# Altium PCB RadiationDetector.PcbDoc (part 1 of 3)
Units mm, origin at the board's own origin, x right, y up, seen from the top; angles counter-clockwise.
Board outline 64 x 110 mm, 2 copper layers (Top Layer, Bottom Layer); 114 components, 79 nets, 398 pads, 0 vias.
Unrouted connection lines stored in the file: 269.
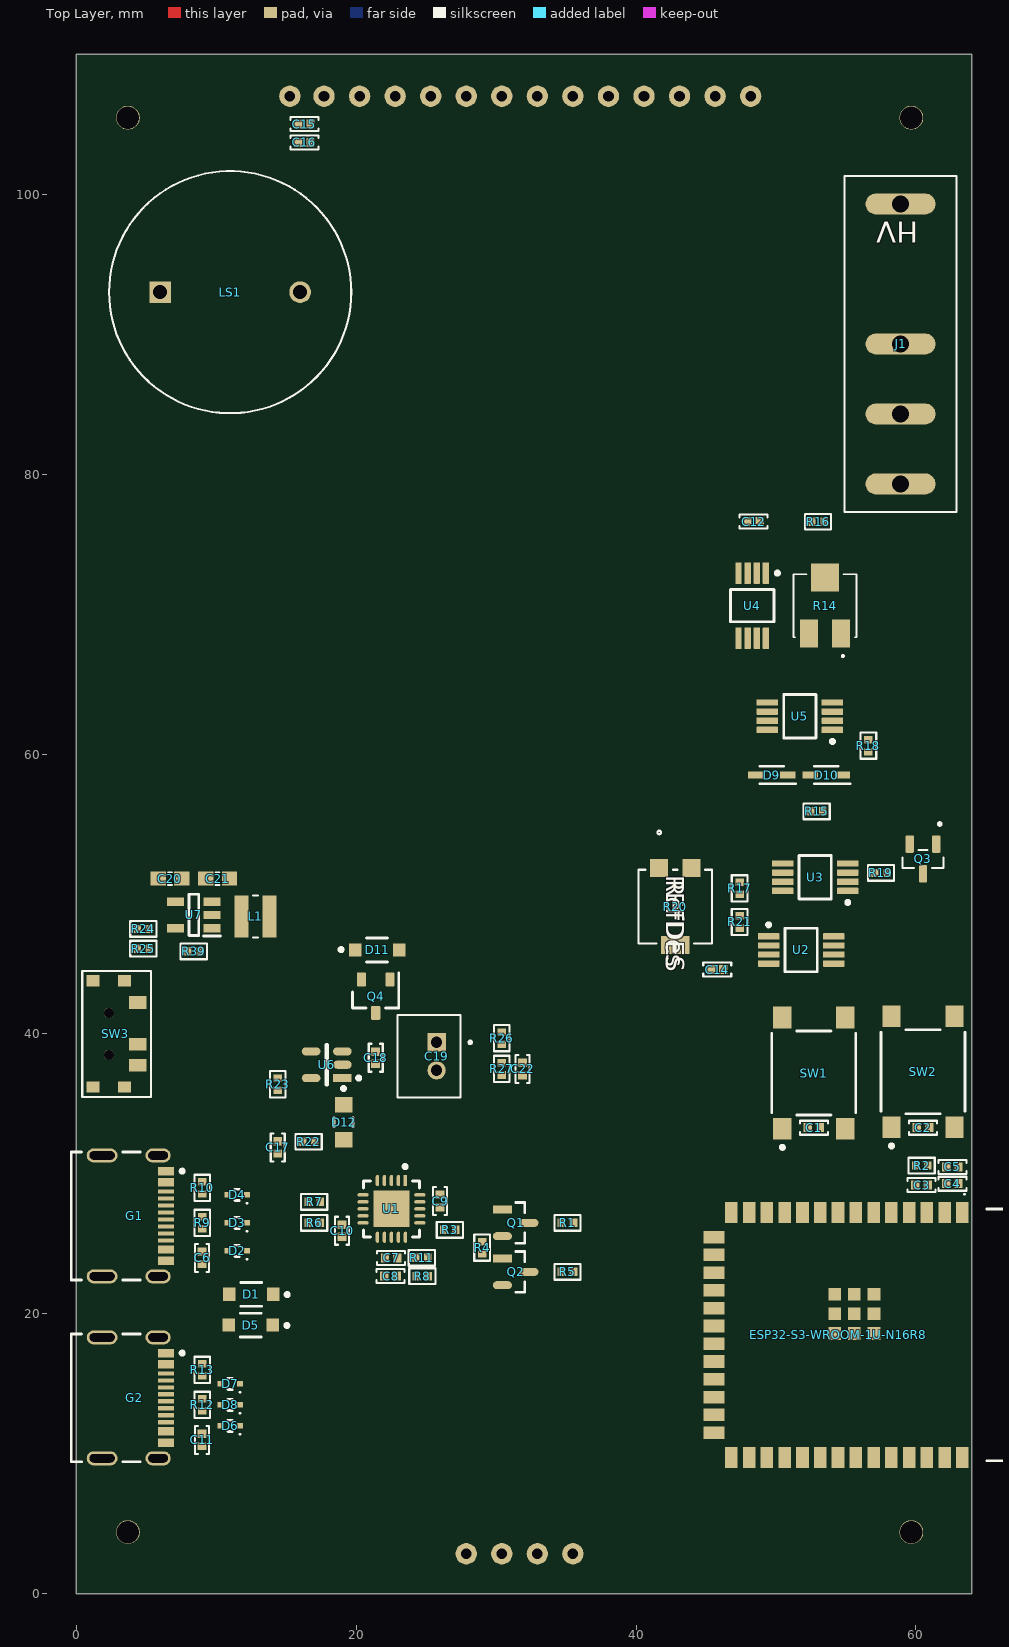
[diagram p0: Top Layer view]
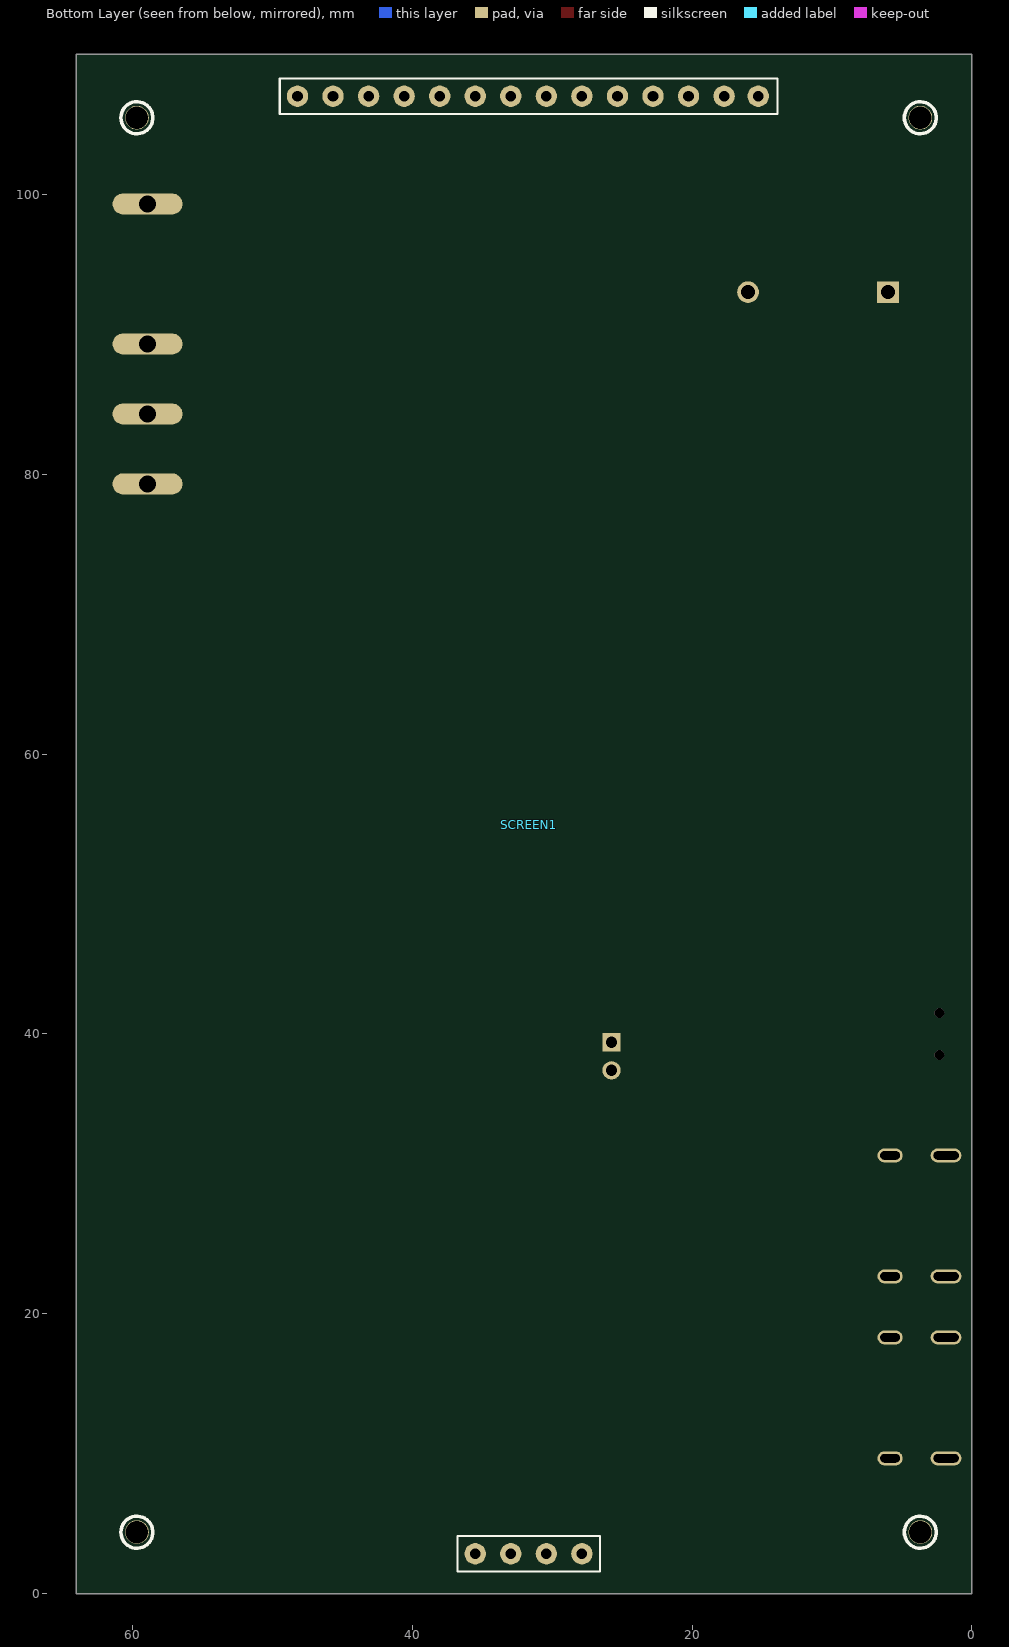
[diagram p1: Bottom Layer view, seen from below]

## Layer stack, top to bottom
Top Solder: solder mask 0.0102, Solder Resist, Dk 3.5
Top Layer: signal copper 0.0356
Dielectric 1: dielectric 0.32, FR-4, Dk 4.8
Bottom Layer: signal copper 0.0356
Bottom Solder: solder mask 0.0102, Solder Resist, Dk 3.5

## Board outline
0,0 64,0 64,110 0,110

## Design rules (kind name [scope] priority, off if disabled: settings)
Clearance [All] p1: gap=0.254 ignorepadtopadclearanceinfootprint=FALSE
ComponentClearance [HasFootprint('LCD_TOUCHSCREEN')] p1: gap=0 collisioncheckmode=3 verticalgap=0 showdistances=FALSE
DiffPairsRouting [All] p1: maxlimit=0.254 minlimit=0.254 mostfreqgap=0.254 toplayer_minwidth=0.381 toplayer_maxwidth=0.381 toplayer_prefwidth=0.381 bottomlayer_minwidth=0.381 bottomlayer_maxwidth=0.381 bottomlayer_prefwidth=0.381 maxuncoupledlength=12.7
PolygonConnect [All] p1: connectstyle=Relief reliefconductorwidth=0.254 reliefentries=4 polygonreliefangle="90 Angle" airgapwidth=0.254
RoutingVias [All] p1: holewidth=0.711 width=1.27 viastyle="Through Hole" minholewidth=0.711 minwidth=1.27 maxholewidth=0.711 maxwidth=1.27
SolderMaskExpansion [All] p1: expansion=0.102 istentingtop=FALSE
SupplyNets "Schematic Supply Nets_3" [InNet('GND')] p1: voltage=0.000
SupplyNets "Schematic Supply Nets_8" [InNet('+Vin_Buck')] p2: voltage=0.000
SupplyNets "Schematic Supply Nets_7" [InNet('+3V3')] p3: voltage=0.000
SupplyNets "Schematic Supply Nets_6" [InNet('V_BAT')] p4: voltage=0.000
SupplyNets "Schematic Supply Nets_5" [InNet('+5V_VBUS2')] p5: voltage=0.000
SupplyNets "Schematic Supply Nets_2" [InNet('+500V')] p6: voltage=0.000
SupplyNets "Schematic Supply Nets_1" [InNet('+5V_VBUS1')] p7: voltage=0.000
SupplyNets "Schematic Supply Nets" [InNet('+5V')] p8: voltage=0.000
Width [All] p1: maxlimit=0.254 minlimit=0.254 preferedwidth=0.254
28 further rules are at their usual default settings.

## Classes and differential pairs
differential pair class DIFF90: ESP_USB
differential pair FTDI_USB: +FTDI_USB_P -FTDI_USB_N
differential pair ESP_USB: +ESP_USB_P -ESP_USB_N
differential pair CON1_USB: +CON1_USB_P -CON1_USB_N

## Components (designator, comment, footprint, x,y, rotation, side; value= is the part's Value field where it differs from the comment)
C1 "0.1uF, 50V" "CAP 0402_1005" 52.7,33.3 r180 top value=100nF
C2 "0.1uF, 50V" "CAP 0402_1005" 60.5,33.3 r180 top value=100nF
C3 "1uF, 16V" "CAP 0402_1005" 60.4,29.2 r180 top value=1uF
C4 "10uF, 10V" "CAP 0402_1005" 62.6,29.3 r180 top value=10uF
C5 "0.1uF, 50V" "CAP 0402_1005" 62.6,30.5 r180 top value=100nF
C6 "0.1uF, 50V" "CAP 0402_1005" 9,24 r90 top value=100nF
C7 "4u7 6.3V" "CAP 0402_1005" 22.5,24 r180 top value=4.7uF
C8 "0.1uF, 50V" "CAP 0402_1005" 22.46,22.7 r180 top value=100nF
C9 "0.1uF, 50V" "CAP 0402_1005" 26,28.06 r90 top value=100nF
C10 "0.1uF, 50V" "CAP 0402_1005" 19,25.94 r90 top value=100nF
C11 "0.1uF, 50V" "CAP 0402_1005" 9,11 r90 top value=100nF
C12 "470p 50V" "CAP 0402_1005" 48.4,76.6 r180 top value=470pF
C13 "220p 50V" "CAP 0402_1005" 116.724,126.331 r90 top value=220pF
C14 "0.1uF, 50V" "CAP 0402_1005" 45.8,44.6 r180 top value=100nF
C15 "10uF, 10V" "CAP 0402_1005" 16.3,105 r180 top value=10uF
C16 "0.1uF, 50V" "CAP 0402_1005" 16.3,103.7 r180 top value=100nF
C17 "4u7 6.3V" "CAP 0402_1005" 14.4,31.9 r90 top value=4.7uF
C18 "4u7 6.3V" "CAP 0402_1005" 21.4,38.3 r90 top value=4.7uF
C19 "2 Pin JST" JST_B2B-PH-K-S 25.2,38.4 r90 top
C20 "22u 6.3V" CAPC1608X90 6.7,51.1 r180 top value=22uF
C21 "22u 6.3V" CAPC1608X90 10.1,51.1 r0 top value=22uF
C22 "0.1uF, 50V" "CAP 0402_1005" 31.9,37.5 r90 top value=100nF
C23 "220u 6.3V" ANTC3225X280N 250.709,-69.249 r0 top value=220uF
C24 "0.1uF, 50V" "CAP 0402_1005" 254.9,-68.614 r90 top value=100nF
C25 "1uF, 16V" "CAP 0402_1005" 260.742,-68.614 r90 top value=1uF
C26 "10nF 1KV" "CAP 1206_3216 - 1.2MM" 203.338,-68.741 r0 top value=10nF
C27 "10nF 1KV" "CAP 1206_3216 - 1.2MM" 163.333,-68.741 r0 top value=10nF
C28 "330pF 100V" CAPC2012X94N 144.537,-69.249 r90 top value=330pF
C29 "220p 50V" "CAP 0402_1005" 109.612,-68.614 r90 top value=220pF
C30 "TLV3691IDCKR" FP-DCK0005A-IPC_B 117.232,-68.868 r0 top
C31 "10 pF 1KV" "CAP 1206_3216 - 1.2MM" 105.294,-68.741 r0 top value=10pF
D1 "1N5819HW-7-F" FP-SOD123-MFG 12.5,21.4 r180 top
D2 "ESD5B5.0ST1G" ONSC-SOD-523-2-502-01_C_V 11.5,24.5 r180 top
D3 "ESD5B5.0ST1G" ONSC-SOD-523-2-502-01_C_V 11.5,26.5 r180 top
D4 "ESD5B5.0ST1G" ONSC-SOD-523-2-502-01_C_V 11.5,28.5 r180 top
D5 "1N5819HW-7-F" FP-SOD123-MFG 12.475,19.2 r180 top
D6 "ESD5B5.0ST1G" ONSC-SOD-523-2-502-01_C_V 11,12 r180 top
D7 "ESD5B5.0ST1G" ONSC-SOD-523-2-502-01_C_V 11,15 r180 top
D8 "ESD5B5.0ST1G" ONSC-SOD-523-2-502-01_C_V 11,13.5 r180 top
D9 "PMEG4010BEA,115" SOD2512X110N 49.7,58.5 r180 top
D10 "PMEG4010BEA,115" SOD2512X110N 53.6,58.5 r180 top
D11 "1N5819HW-7-F" FP-SOD123-MFG 21.5,46 r0 top
D12 "RED LED" FP-LTST-C171KGKT-MFG 19.1,33.7 r270 top
D13 "RS2MBF" RS2MBF 244.359,-72.17 r90 top
D14 "3SMAJ5951B-TP" DIOM4325X244N 237.755,-71.154 r90 top
D15 "3SMAJ5951B-TP" DIOM4325X244N 191.019,-71.154 r90 top
D16 "3SMAJ5951B-TP" DIOM4325X244N 168.54,-71.154 r90 top
D17 "3SMAJ5951B-TP" DIOM4325X244N 151.014,-71.154 r90 top
D18 "3SMAJ5951B-TP" DIOM4325X244N 139.584,-71.154 r90 top
D19 "BAS21" SOT-23 134.25,-69.249 r0 top
D20 "BAS21" SOT-23 98.944,-69.249 r0 top
ESP32-S3-WROOM-1U-N16R8 "ESP32-S3-WROOM-1U-N16R8" ESP32S3WROOM1N8R2 58.06,18.5 r270 top
G1 "2171790001" FP-2171790001-MFG 3,27 r270 top
G2 "2171790001" FP-2171790001-MFG 3,14 r270 top
J1 "GX16_4PIN" WIRE_HARNESS_4PIN_HV 58.9,89.3 r180 top
L1 "2.2 uH" IND_VLS3015ET-220M-CA 12.8,48.4 r0 top
L2 "1mH 1.850R" 48102SC 280.046,-74.71 r0 top
LS1 "PS1720P02" FP-PS1720P02-MFG 11,93 r0 top
Q1 "SS8050-G" FP-SS8050-G-IPC_B 31.4,26.5 r0 top
Q2 "SS8050-G" FP-SS8050-G-IPC_B 31.4,23 r0 top
Q3 "2N7002" SOT95P240X111-3N 60.5,52.5 r270 top
Q4 "WPM2015-3/TR" SOT-23 21.4,42.7 r270 top
Q5 "HX2300A" SOT-23 180.351,-69.249 r0 top
Q6 "STD3NK80ZT4" DPAK_STM 210.958,-72.805 r0 top
R1 "0R" RESC1005X37N 35.1,26.5 r0 top
R2 "10K" RESC1005X37N 60.4,30.6 r0 top value=10kR
R3 "10K" RESC1005X37N 26.7,26 r0 top value=10kR
R4 "10K" RESC1005X37N 29,24.732 r270 top value=10kR
R5 "0R" RESC1005X37N 35.1,23 r0 top
R6 "27R" RESC1005X37N 17,26.5 r0 top
R7 "27R" RESC1005X37N 17,28 r0 top
R8 "4K7" RESC1005X37N 24.732,22.7 r180 top value=4.7kR
R9 "5k1" RESC1005X37N 9,26.5 r270 top value=5.1kR
R10 "5k1" RESC1005X37N 9,29 r90 top value=5.1kR
R11 "10K" RESC1005X37N 24.7,24 r0 top value=10kR
R12 "5k1" RESC1005X37N 9,13.5 r90 top value=5.1kR
R13 "5k1" RESC1005X37N 9,16 r90 top value=5.1kR
R14 "2K" TRIM_3314J-1-202E 53.5,70.6 r0 top value=2kR
R15 "1K" RESC1005X37N 52.9,55.9 r0 top value=1kR
R16 "150R" RESC1005X37N 53,76.6 r0 top
R17 "47K" RESC1005X37N 47.4,50.4 r90 top value=47kR
R18 "50R" RESC1005X37N 56.6,60.6 r90 top
R19 "1K" RESC1005X37N 57.5,51.5 r180 top value=1kR
R20 "10K" TS53YL_VIS 42.8,49.1 r270 top value=10kR
R21 "1K" RESC1005X37N 47.4,48 r90 top value=1kR
R22 "150R" RESC1005X37N 16.6,32.3 r180 top
R23 "2KR" RESC1005X37N 14.4,36.4 r270 top
R24 "220K" RESC1005X37N 4.8,47.5 r180 top value=220kR
R25 "49.9K" RESC1005X37N 4.8,46.1 r180 top value=49.9kR
R26 "470K" RESC1005X37N 30.4,39.7 r90 top value=470kR
R27 "150K" RESC1005X37N 30.4,37.5 r270 top value=150kR
R28 "560R" RESC1005X37N 266.711,-68.614 r90 top
R29 "1M" RESC1005X37N 225.182,-68.614 r90 top value=1MR
R30 "10M" RESC1005X37N 231.024,-68.614 r90 top value=10MR
R31 "4.99M" RESC3116X65N 220.991,-68.614 r0 top value=4.99MR
R32 "10K" RESC1005X37N 195.718,-68.614 r90 top value=10kR
R33 "4.99M" RESC3116X65N 185.812,-68.614 r0 top value=4.99MR
R34 "4.99M" RESC3116X65N 174.89,-68.614 r0 top value=4.99MR
R35 "82K" RESC1005X37N 155.586,-68.614 r90 top value=82kR
R36 "200K" RESC1005X37N 121.296,-68.614 r90 top value=200kR
R37 "2M" RESC1005X37N 127.138,-68.614 r90 top value=2MR
R38 "3M" RESC1005X37N 91.832,-68.614 r90 top value=3MR
R39 "100K" RESC1005X37N 8.4,45.9 r0 top value=100kR
SCREEN1 "LCD_TOUCHSCREEN" LCD_TouchScreen 31.678,54.93 r180 bottom locked
SW1 "PTS645SH50SMTR92 LFS" FP-PTS645SH50SMTR92LFS-MFG 52.7,37.2 r90 top
SW2 "PTS645SH50SMTR92 LFS" FP-PTS645SH50SMTR92LFS-MFG 60.5,37.3 r90 top
SW3 "MK-12C02-G015" Switch 2.8,40 r90 top
U1 "FT231XQ-R" FP-QFN-20-MFG 22.525,27.5 r270 top
U2 "OPA2354AIDGKR" DGK0008A_M 51.8,46 r0 top
U3 "OPA2354AIDGKR" DGK0008A_M 52.8,51.2 r180 top
U4 "OPA2354AIDGKR" DGK0008A_M 48.3,70.6 r270 top
U5 "OPA2354AIDGKR" DGK0008A_M 51.7,62.7 r180 top
U6 "MCP73831T-2ACI/OT" FP-C04-091-OT-IPC_B 17.9,37.8 r180 top
U7 "SY8089AAAC" SOT95P285X140-5N 8.4,48.5 r180 top

## Footprints (in the part's own frame and the unit in brackets; to place one, negate y for a bottom-side part, rotate by r counter-clockwise, add the part's x,y. Pads: shape width x height; smd on the part's side, far side on the other; paste and mask are expansions set on the pad)
48102SC [mm]
  rect 2.9x5 smd: 1(-4.95,0) 2(4.95,0)
  silkscreen extent -7.5,-6.1 6.1,6.1, body extent -6.11,-6.1 6.11,6.1, height 6.1
ANTC3225X280N [mm]
  rect 1.45x2.81 smd: 1(-1.43,0) 2(1.43,0)
  silkscreen extent -0.39,-1.4 0.39,1.4, body extent -1.6,-1.25 1.6,1.25, height 2.8
"CAP 0402_1005" [mm] "Chip Capacitor, 2-Leads, Body 1.02x0.51mm, IPC Medium Density"
  rect 0.6x0.64 smd: 1(-0.44,0) 2(0.44,0)
  silkscreen extent -1,-0.5 1,0.5, body extent -0.5,-0.26 0.5,0.26, height 0.52
"CAP 1206_3216 - 1.2MM" [mm] "Chip Capacitor, 2-Leads, Body 3.25x1.60mm, IPC Medium Density"
  rect 1.3x1.8 smd: 1(-1.45,0) 2(1.45,0)
  silkscreen extent -2.37,-1.12 2.37,1.12, body extent -1.6,-0.8 1.6,0.8, height 1.2
CAPC1608X90 [mm]
  rect 1.1x1 smd: 1(-0.85,0) 2(0.85,0)
  silkscreen extent -0.15,-0.45 0.15,0.45, body extent -0.8,-0.4 0.8,0.4, height 0.9
CAPC2012X94N [mm]
  rect 1.16x1.47 smd: 1(-0.88,0) 2(0.88,0)
  body extent -1,-0.63 1,0.63, height 0.94
DGK0008A_M [mm] "TSOP, 8-Leads, Body 3.1x3.1mm, Pitch 0.65mm, IPC Low Density"
  rrect22% 1.55x0.45 smd: 1(-2.325,0.975) 2(-2.325,0.325) 3(-2.325,-0.325) 4(-2.325,-0.975) 5(2.325,-0.975) 6(2.325,-0.325) 7(2.325,0.325) 8(2.325,0.975)
  silkscreen extent -2.45,-1.55 1.15,1.92, body extent -2.45,-1.5 2.45,1.5, height 0.94
DIOM4325X244N [mm]
  rect 2.33x1.55 smd: 1(-2.135,0) 2(2.135,0)
  silkscreen extent -4.15,-1.29 2.19,1.29
DPAK_STM [mil]
  rect 37x98 smd paste+0 mask+0: 1(-90,-251.5) 3(90,-251.5)
  rect 219x248 smd paste+0 mask+0: 2(0,69.5)
  silkscreen extent -138,-188 138,128, body extent -127,-234 128,148, height 94
ESP32S3WROOM1N8R2 [mm]
  rect 1.5x0.9 smd: 1(-8.75,5.26) 2(-8.75,3.99) 3(-8.75,2.72) 4(-8.75,1.45) 5(-8.75,0.18) 6(-8.75,-1.09) 7(-8.75,-2.36) 8(-8.75,-3.63) 9(-8.75,-4.9) 10(-8.75,-6.17) 11(-8.75,-7.44) 12(-8.75,-8.71) 13(-8.75,-9.98) 14(-8.75,-11.25) 27(8.75,-11.25) 28(8.75,-9.98) 29(8.75,-8.71) 30(8.75,-7.44) 31(8.75,-6.17) 32(8.75,-4.9) 33(8.75,-3.63) 34(8.75,-2.36) 35(8.75,-1.09) 36(8.75,0.18) 37(8.75,1.45) 38(8.75,2.72) 39(8.75,3.99) 40(8.75,5.26)
  rect 0.9x1.5 smd: 15(-6.985,-12.5) 16(-5.715,-12.5) 17(-4.445,-12.5) 18(-3.175,-12.5) 19(-1.905,-12.5) 20(-0.635,-12.5) 21(0.635,-12.5) 22(1.905,-12.5) 23(3.175,-12.5) 24(4.445,-12.5) 25(5.715,-12.5) 26(6.985,-12.5)
  rect 0.9x0.9 smd: 41(-1.5,-2.46) 42(-1.5,-1.06) 43(-2.9,-1.06) 44(-2.9,-2.46) 45(-2.9,-3.86) 46(-1.5,-3.86) 47(-0.1,-3.86) 48(-0.1,-2.46) 49(-0.1,-1.06)
  silkscreen extent -10.1,5.35 9,12.75, body extent -9,-12.75 9,12.75, height 3.25
FP-2171790001-MFG [mm]
  rect 0.6x1.15 smd paste+0 mask+0: A1B12(-3.2,3.425) A4B9(-2.4,3.425) B1A12(3.2,3.425) B4A9(2.4,3.425)
  rect 0.3x1.15 smd paste+0 mask+0: A5(-1.25,3.425) A6(-0.25,3.425) A7(0.25,3.425) A8(1.25,3.425) B5(1.75,3.425) B6(0.75,3.425) B7(-0.75,3.425) B8(-1.75,3.425)
  rrect100% 1x1.8 hole 1.4 slot 0.6 at 0 deg paste-2539.97 mask+0: S1(-4.32,2.85) S2(4.32,2.85)
  rrect100% 1x2.2 hole 1.8 slot 0.6 at 0 deg paste-2539.97 mask+0: S3(-4.32,-1.15) S4(4.32,-1.15)
  silkscreen extent -4.57,-3.35 4.57,4.7, body extent -4.92,-3.45 4.92,4.1, height 0.25
FP-C04-091-OT-IPC_B [mm]
  rect 1.338x0.578 smd paste+0 mask+0: 1(-1.116,0.95)
  rrect100% 1.338x0.578 smd paste+0 mask+0: 2(-1.116,0) 3(-1.116,-0.95) 4(1.116,-0.95) 5(1.116,0.95)
  silkscreen extent -2.41,-1.45 0.05,1.45, body extent -1.35,-1.46 1.35,1.44, height 1.45
FP-DCK0005A-IPC_B [mm]
  rect 1.464x0.376 smd paste+0 mask+0: 1(-0.82,0.65)
  rrect100% 1.464x0.376 smd paste+0 mask+0: 2(-0.82,0) 3(-0.82,-0.65) 4(0.82,-0.65) 5(0.82,0.65)
  silkscreen extent -2.23,-1.25 1.05,1.25, body extent -1.05,-1 1.05,1, height 1
FP-LTST-C171KGKT-MFG [mm]
  rect 1.1x1.25 smd paste+0 mask+0: 1(-1.25,0) 2(1.25,0)
  silkscreen extent -2.52,-0.67 0.33,0.67, body extent -1.9,-0.77 1.9,0.77, height 0.25
FP-PS1720P02-MFG [mm]
  rect 1.55x1.55 hole 1 paste-2539.97 mask+0: 1(-5,0)
  round 1.55 hole 1 paste-2539.97 mask+0: 2(5,0)
  silkscreen extent -8.65,-8.65 8.65,8.65, body extent -8.75,-8.75 8.75,8.75, height 0.25
FP-PTS645SH50SMTR92LFS-MFG [mm]
  rect 1.55x1.3 smd paste+0 mask+0: 1(-3.975,2.25) 2(3.975,2.25) 3(-3.975,-2.25) 4(3.975,-2.25)
  silkscreen extent -5.42,-3 3,3, body extent -4.5,-3 4.5,3, height 4.3
FP-QFN-20-MFG [mm]
  rect 0.8x0.25 smd paste+0 mask+0: 1(-2.025,1)
  rrect100% 0.8x0.25 smd paste+0 mask+0: 2(-2.025,0.5) 3(-2.025,0) 4(-2.025,-0.5) 5(-2.025,-1) 11(2.025,-1) 12(2.025,-0.5) 13(2.025,0) 14(2.025,0.5) 15(2.025,1)
  rrect100% 0.25x0.8 smd paste+0 mask+0: 6(-1,-2.025) 7(-0.5,-2.025) 8(0,-2.025) 9(0.5,-2.025) 10(1,-2.025) 16(1,2.025) 17(0.5,2.025) 18(0,2.025) 19(-0.5,2.025) 20(-1,2.025)
  rect 2.6x2.6 smd paste+0 mask+0: 21(0,0)
  silkscreen extent -3.15,-2 2,2, body extent -2.52,-2.52 2.52,2.52, height 0.25
FP-SOD123-MFG [mm]
  rect 0.9x0.95 smd paste+0 mask+0: 1(-1.575,0) 2(1.575,0)
  silkscreen extent -2.7,-0.85 0.75,0.85, body extent -2.12,-0.95 2.12,0.95, height 0.25
FP-SS8050-G-IPC_B [mm]
  rect 1.357x0.572 smd paste+0 mask+0: 1(-0.951,0.95)
  rrect100% 1.357x0.572 smd paste+0 mask+0: 2(-0.951,-0.95) 3(0.951,0)
  silkscreen extent 0,-1.45 0.65,1.45, body extent -1.88,-1.7 1.88,1.7, height 0.25
IND_VLS3015ET-220M-CA [mm]
  rect 1x3 smd: 1(-1,0) 2(1,0)
  silkscreen extent -0.18,-1.5 0.18,1.5, body extent -1.5,-1.5 1.5,1.5, height 1.5
JST_B2B-PH-K-S [mm]
  rect 1.308x1.308 / inner round 1.308 / far side rect 1.308x1.308 hole 0.8: 1(1,-0.55)
  round 1.308 hole 0.8: 2(-1,-0.55)
  silkscreen extent -2.95,-3.05 2.95,2.25, body extent -2.95,-2.25 2.95,2.25, height 6
LCD_TouchScreen [mil]
  round 60 hole 30: 1(550,2050) 2(646.04,2050) 3(450,2050) 4(350,2050) 5(250,2050) 6(150,2050) 7(50,2050) 8(-50,2050) 9(-150,2050) 10(-350,2050) 11(-250,2050) 12(-450,2050) 13(-550,2050) 14(-650,2050) 15(-150,-2050) 16(-50,-2050) 17(50,-2050) 18(150,-2050)
  round 66.93 hole 62.99: 21(-1101.81,-1989.37) 21(-1101.81,1989.37) 21(1101.81,-1989.37) 21(1101.81,1989.37)
  silkscreen extent -1147,-2100 1147,2100, body extent -1224,-2106 1207,2106, height 343
ONSC-SOD-523-2-502-01_C_V [mm] "SOD, 2-Leads, Body 1.2x0.8mm"
  rect 0.4x0.4 smd: 1(-0.7,0) 2(0.7,0)
  silkscreen extent -0.75,-0.4 0.15,0.65, body extent -0.6,-0.4 0.6,0.4, height 0.7
RESC1005X37N [mm]
  rect 0.54x0.6 smd: 1(-0.432,0) 2(0.432,0)
  silkscreen extent -0.94,-0.56 0.94,0.56, body extent -0.5,-0.25 0.5,0.25, height 0.37
RESC3116X65N [mm]
  rect 0.97x1.73 smd: 1(-1.48,0) 2(1.48,0)
  silkscreen extent -0.67,-0.85 0.67,0.85, body extent -1.55,-0.8 1.55,0.8, height 0.65
RS2MBF [mm]
  rect 1.8x2.54 smd: 1(2.4,0) 2(-2.4,0)
  silkscreen extent -4.53,-2.5 4.53,2.5, body extent -2.7,-1.81 2.7,1.81, height 2.47
SOD2512X110N [mm]
  rect 1.1x0.5 smd: 1(-1.15,0) 2(1.15,0)
  silkscreen extent -1.7,-0.63 0.85,0.63, body extent -1.25,-0.59 1.24,0.66, height 0.92
SOT95P240X111-3N [mm]
  rrect25% 1.23x0.6 smd: 1(-1.06,0.95) 2(-1.06,-0.95) 3(1.06,0)
  silkscreen extent -2.6,-1.46 0.65,1.46, body extent -1.3,-1.53 1.3,1.52, height 1.3
SOT95P285X140-5N [mm]
  rect 1.2x0.6 smd: 1(-1.3,0.95) 2(-1.3,0) 3(-1.3,-0.95) 4(1.3,-0.95) 5(1.3,0.95)
  silkscreen extent -1.9,-1.48 0.35,1.5, body extent -1.43,-1.48 1.43,1.48, height 1.4
SOT-23 [mm] "SOT23, 3-Leads, IPC Medium Density, TO-236"
  rrect25% 1x0.65 smd: 1(-1.2,1.02) 2(-1.2,-1.02) 3(1.2,0)
  silkscreen extent -1.65,-1.65 0.85,1.65, body extent -1.33,-1.53 1.27,1.52, height 1.3
Switch [mm]
  rect 0.9x1.25 smd: 1(-2.25,-1.605) 2(-0.75,-1.605) 3(2.25,-1.605)
  rect 0.8x0.93 smd: 26(-3.8,-0.665) 26(-3.8,1.605) 26(3.8,-0.665) 26(3.8,1.605)
  round 0.7 hole 0.705: 27(-1.5,0.47) 27(1.5,0.47)
  silkscreen extent -4.5,-2.53 4.5,2.37, body extent -3.95,-2.03 3.95,3.37, height 1.4
TRIM_3314J-1-202E [mm]
  rect 1.3x2 smd: 1(1.15,-2) 3(-1.15,-2)
  rect 2x2 smd: 2(0,2)
  silkscreen extent -2.25,-3.65 2.25,2.25, body extent -2.5,-2.5 2.5,2.5, height 2.55
TS53YL_VIS [mil]
  rect 51x51 smd paste+0 mask+0: 1(-108.27,-45.28) 3(-108.27,45.28)
  rect 51x79 smd paste-25.5 mask+0: 2(108.27,0)
  Top Layer region: 0,-39.5 0,-39.5 0,-39.5 0,-39.5 0,-39.5 0,-39.5 0,-39.5 0,-39.5
  Top Layer region: 0,39.5 0,39.5 0,39.5 0,39.5 0,39.5 0,39.5 0,39.5 0,39.5
  silkscreen extent -214,-104 104,104, body extent -150,-138 151,134, height 105
WIRE_HARNESS_4PIN_HV [mm]
  oval 5x1.5 hole 1.2: 0(0,10) 1(0,5) 2(0,0) 3(0,-10)
  silkscreen extent -4,-12 4,12

## Part data
C1 C2 C5 C6 C8 C9 C10 C11 C14 C16 C22 C24: library part CL05B104KB5NNNC, "CAP CER 0.1UF 50V X7R 0402", Capacitor Type=Ceramic, Case/Package=0402, LCSC Part Number=C960916, Manufacturer=Samsung, Max Operating Temperature=125°C, Min Operating Temperature=-55°C, Package Shape=Rectangular, Rated DC Voltage (URdc)=50V, Temperature Characteristics Code=X7R, Tolerance  (fill in as +-)=10%, Category="Ceramic Capacitors", ComponentLink1Description=https://datasheet.ciiva.com:443/pdfs/VipMasterIC/IC/SEMS/SEMS-S-A0008523115/SEMS-S-A0008523176-1.pdf?src-supplier=IHS+Markit, ComponentLink1URL=https://datasheet.ciiva.com:443/pdfs/VipMasterIC/IC/SEMS/SEMS-S-A0008523115/SEMS-S-A0008523176-1.pdf?src-supplier=IHS+Markit, ComponentLink2Description=https://datasheet.octopart.com/CL05B104KB5NNNC-Samsung-datasheet-97040617.pdf?src-supplier=Future+Electronics, ComponentLink2URL=https://datasheet.octopart.com/CL05B104KB5NNNC-Samsung-datasheet-97040617.pdf?src-supplier=Future+Electronics, ComponentLink3Description=https://datasheet.octopart.com/CL05B104KB5NNNC-Samsung-datasheet-8326407.pdf?src-supplier=TME, ComponentLink3URL=https://datasheet.octopart.com/CL05B104KB5NNNC-Samsung-datasheet-8326407.pdf?src-supplier=TME, Dielectric Material=Ceramic, JESD-609 Code=e3, Manufacturer Part Number=CL05B104KB5NNNC, Mounting Technology="Surface Mount", Multilayer=Yes, Packaging="Tape and Reel", Pins=2, Pricing="100000=0,00598, 120000=0,00595, 220000=0,00592, 500000=0,00589, 1000000=0,00586 (USD)", Reach SVHC Compliant=Yes, RoHS=Yes, RoHS Compliant=Yes, Supplier=Avnet, Supplier Part Number=CL05B104KB5NNNC, Terminal Finish=Nickel, Termination=Wraparound, Tolerance (fill in as +-)=10%
C3 C25: library part CL05A105KO5NNNC, "CAP CER 1UF 16V X5R 0402", Capacitor Type=Ceramic, Case/Package=0402, LCSC Part Number=C29266, Manufacturer="Samsung Electro-Mechanics", Max Operating Temperature=85°C, Min Operating Temperature=-55°C, Package Shape=Rectangular, Package Style=SMTMeter, Rated DC Voltage (URdc)=16V, Supplier Part Number=1276-1067-1-ND, Temperature Characteristics Code=X5R, Tolerance  (fill in as +-)=10%, Category="Ceramic Capacitors", ComponentLink1Description=https://datasheet.ciiva.com:443/pdfs/VipMasterIC/IC/SEMS/SEMS-S-A0008384515/SEMS-S-A0008892675-1.pdf?src-supplier=IHS+Markit, ComponentLink1URL=https://datasheet.ciiva.com:443/pdfs/VipMasterIC/IC/SEMS/SEMS-S-A0008384515/SEMS-S-A0008892675-1.pdf?src-supplier=IHS+Markit, ComponentLink2Description=https://datasheet.octopart.com/CL05A105KO5NNNC-Samsung-Electro-Mechanics-datasheet-181960514.pdf?src-supplier=Farnell, ComponentLink2URL=https://datasheet.octopart.com/CL05A105KO5NNNC-Samsung-Electro-Mechanics-datasheet-181960514.pdf?src-supplier=Farnell, ComponentLink3Description=https://datasheet.octopart.com/CL05A105KO5NNNC-Samsung-Electro-Mechanics-datasheet-136031720.pdf?src-supplier=Samsung+SCT, ComponentLink3URL=https://datasheet.octopart.com/CL05A105KO5NNNC-Samsung-Electro-Mechanics-datasheet-136031720.pdf?src-supplier=Samsung+SCT, ComponentLink4Description=https://datasheet.octopart.com/CL05A105KO5NNNC-Samsung-Electro-Mechanics-datasheet-110226202.pdf?src-supplier=Future+Electronics, ComponentLink4URL=https://datasheet.octopart.com/CL05A105KO5NNNC-Samsung-Electro-Mechanics-datasheet-110226202.pdf?src-supplier=Future+Electronics, ComponentLink5Description=https://datasheet.octopart.com/CL05A105KO5NNNC-Samsung-Electro-Mechanics-datasheet-81461590.pdf?src-supplier=Future+Electronics, ComponentLink5URL=https://datasheet.octopart.com/CL05A105KO5NNNC-Samsung-Electro-Mechanics-datasheet-81461590.pdf?src-supplier=Future+Electronics, ComponentLink6Description=https://datasheet.octopart.com/CL05A105KO5NNNC-Samsung-Electro-Mechanics-datasheet-149136633.pdf?src-supplier=Future+Electronics, ComponentLink6URL=https://datasheet.octopart.com/CL05A105KO5NNNC-Samsung-Electro-Mechanics-datasheet-149136633.pdf?src-supplier=Future+Electronics, ComponentLink7Description=https://datasheet.octopart.com/CL05A105KO5NNNC-Samsung-Electro-Mechanics-datasheet-97040617.pdf, ComponentLink7URL=https://datasheet.octopart.com/CL05A105KO5NNNC-Samsung-Electro-Mechanics-datasheet-97040617.pdf, ComponentLink8Description=https://datasheet.octopart.com/CL05A105KO5NNNC-Samsung-Electro-Mechanics-datasheet-8324245.pdf, ComponentLink8URL=https://datasheet.octopart.com/CL05A105KO5NNNC-Samsung-Electro-Mechanics-datasheet-8324245.pdf, ComponentLink9Description=https://datasheet.octopart.com/General-Multilayer-Ceramic-Capacitors-Samsung-datasheet-family-111.pdf, ComponentLink9URL=https://datasheet.octopart.com/General-Multilayer-Ceramic-Capacitors-Samsung-datasheet-family-111.pdf, ComponentLink10Description=https://datasheet.octopart.com/CL05A105KO5NNNC-Samsung-Electro-Mechanics-datasheet-11776774.pdf?src-supplier=Arrow+Electronics, ComponentLink10URL=https://datasheet.octopart.com/CL05A105KO5NNNC-Samsung-Electro-Mechanics-datasheet-11776774.pdf?src-supplier=Arrow+Electronics, ComponentLink11Description=https://datasheet.octopart.com/CL05A105KO5NNNC-Samsung-datasheet-97040617.pdf, ComponentLink11URL=https://datasheet.octopart.com/CL05A105KO5NNNC-Samsung-datasheet-97040617.pdf, ComponentLink12Description=https://datasheet.octopart.com/CL05A105KO5NNNC-Samsung-datasheet-8324245.pdf, ComponentLink12URL=https://datasheet.octopart.com/CL05A105KO5NNNC-Samsung-datasheet-8324245.pdf, ComponentLink13Description=https://datasheet.octopart.com/CL05A105KO5NNNC-Samsung-datasheet-42280519.pdf?src-supplier=Future+Electronics, ComponentLink13URL=https://datasheet.octopart.com/CL05A105KO5NNNC-Samsung-datasheet-42280519.pdf?src-supplier=Future+Electronics, ComponentLink14Description=https://datasheet.octopart.com/CL05A105KO5NNNC-Samsung-datasheet-34152987.pdf?src-supplier=Future+Electronics, ComponentLink14URL=https://datasheet.octopart.com/CL05A105KO5NNNC-Samsung-datasheet-34152987.pdf?src-supplier=Future+Electronics, ComponentLink15Description=https://datasheet.octopart.com/CL05A105KO5NNNC-Samsung-datasheet-11776774.pdf?src-supplier=Future+Electronics, ComponentLink15URL=https://datasheet.octopart.com/CL05A105KO5NNNC-Samsung-datasheet-11776774.pdf?src-supplier=Future+Electronics, ComponentLink16Description=https://datasheet.octopart.com/CL05A105KO5NNNC-Samsung-datasheet-8329584.pdf?src-supplier=Future+Electronics, ComponentLink16URL=https://datasheet.octopart.com/CL05A105KO5NNNC-Samsung-datasheet-8329584.pdf?src-supplier=Future+Electronics, ComponentLink17Description=https://datasheet.octopart.com/CL05A105KO5NNNC-Samsung-datasheet-59220082.pdf?src-supplier=TME, ComponentLink17URL=https://datasheet.octopart.com/CL05A105KO5NNNC-Samsung-datasheet-59220082.pdf?src-supplier=TME, Dielectric Material=Ceramic, Height=0.55mm, JESD-609 Code=e3, Length=1mm, Manufacturer Part Number=CL05A105KO5NNNC, Mounting Technology="Surface Mount", Multilayer=Yes, Packaging="Tape and Reel", Pins=2, Pricing="1=0,08, 10=0,014, 100=0,0104, 1000=0,0072, 2500=0,0064 (USD)", Reach SVHC Compliant=Yes, RoHS Compliant=Yes, Stock=655135, Supplier=Digikey, Terminal Finish=Nickel, Termination=Wraparound, Tolerance (fill in as +-)=10%, Width=0.5mm
C4 C15: library part CL05A106MP8NUB8, "CAP CER 10UF 10V X5R 0402", Capacitor Type=Ceramic, Case/Package=0402, LCSC Part Number=C307415, Manufacturer="Samsung Electro-Mechanics", Max Operating Temperature=85°C, Min Operating Temperature=-55°C, Package Shape=Rectangular, Rated DC Voltage (URdc)=10V, Supplier Part Number=1276-6830-1-ND, Temperature Characteristics Code=X5R, Tolerance  (fill in as +-)=20%, Category="Ceramic Capacitors", ComponentLink1Description=https://datasheet.ciiva.com:443/pdfs/VipMasterIC/IC/SEMS/SEMS-S-A0008521219/SEMS-S-A0008521325-1.pdf?src-supplier=IHS+Markit, ComponentLink1URL=https://datasheet.ciiva.com:443/pdfs/VipMasterIC/IC/SEMS/SEMS-S-A0008521219/SEMS-S-A0008521325-1.pdf?src-supplier=IHS+Markit, ComponentLink2Description=https://datasheet.octopart.com/CL05A106MP8NUB8-Samsung-Electro-Mechanics-datasheet-181551178.pdf?src-supplier=Farnell, ComponentLink2URL=https://datasheet.octopart.com/CL05A106MP8NUB8-Samsung-Electro-Mechanics-datasheet-181551178.pdf?src-supplier=Farnell, ComponentLink3Description=https://datasheet.octopart.com/CL05A106MP8NUB8-Samsung-Electro-Mechanics-datasheet-141346815.pdf?src-supplier=Samsung+SCT, ComponentLink3URL=https://datasheet.octopart.com/CL05A106MP8NUB8-Samsung-Electro-Mechanics-datasheet-141346815.pdf?src-supplier=Samsung+SCT, ComponentLink4Description=https://datasheet.octopart.com/CL05A106MP8NUB8-Samsung-Electro-Mechanics-datasheet-136460857.pdf?src-supplier=Future+Electronics, ComponentLink4URL=https://datasheet.octopart.com/CL05A106MP8NUB8-Samsung-Electro-Mechanics-datasheet-136460857.pdf?src-supplier=Future+Electronics, ComponentLink5Description=https://datasheet.octopart.com/CL05A106MP8NUB8-Samsung-Electro-Mechanics-datasheet-110326781.pdf?src-supplier=Future+Electronics, ComponentLink5URL=https://datasheet.octopart.com/CL05A106MP8NUB8-Samsung-Electro-Mechanics-datasheet-110326781.pdf?src-supplier=Future+Electronics, ComponentLink6Description=https://datasheet.octopart.com/CL05A106MP8NUB8-Samsung-Electro-Mechanics-datasheet-96443587.pdf?src-supplier=Future+Electronics, ComponentLink6URL=https://datasheet.octopart.com/CL05A106MP8NUB8-Samsung-Electro-Mechanics-datasheet-96443587.pdf?src-supplier=Future+Electronics, ComponentLink7Description=https://datasheet.octopart.com/CL05A106MP8NUB8-Samsung-Electro-Mechanics-datasheet-68297032.pdf?src-supplier=Future+Electronics, ComponentLink7URL=https://datasheet.octopart.com/CL05A106MP8NUB8-Samsung-Electro-Mechanics-datasheet-68297032.pdf?src-supplier=Future+Electronics, ComponentLink8Description=https://datasheet.octopart.com/CL05A106MP8NUB8-Samsung-Electro-Mechanics-datasheet-86032222.pdf?src-supplier=Future+Electronics, ComponentLink8URL=https://datasheet.octopart.com/CL05A106MP8NUB8-Samsung-Electro-Mechanics-datasheet-86032222.pdf?src-supplier=Future+Electronics, Dielectric Material=Ceramic, JESD-609 Code=e3, Manufacturer Part Number=CL05A106MP8NUB8, Mounting Technology="Surface Mount", Multilayer=Yes, Packaging="Tape and Reel", Pins=2, Pricing="1=0,2, 10=0,12, 100=0,0808, 1000=0,0568 (USD)", Reach SVHC Compliant=Yes, RoHS Compliant=Yes, Stock=145439, Supplier=Digikey, Terminal Finish=Nickel, Termination=Wraparound, Tolerance (fill in as +-)=20%
C7 C17 C18: library part CL05A475KQ5NRNC, "CAP CER 4.7UF 6.3V X5R 0402", Capacitor Type=Ceramic, Case/Package=0402, LCSC Part Number=C2932473, Manufacturer=Samsung, Max Operating Temperature=85°C, Min Operating Temperature=-55°C, Package Shape=Rectangular, Rated DC Voltage (URdc)=6.3V, Supplier Part Number=1276-1481-1-ND, Temperature Characteristics Code=X5R, Tolerance  (fill in as +-)=10%, Category="Ceramic Capacitors", ComponentLink1Description=https://datasheet.ciiva.com:443/pdfs/VipMasterIC/IC/SEMS/SEMS-S-A0008521219/SEMS-S-A0008521124-1.pdf?src-supplier=IHS+Markit, ComponentLink1URL=https://datasheet.ciiva.com:443/pdfs/VipMasterIC/IC/SEMS/SEMS-S-A0008521219/SEMS-S-A0008521124-1.pdf?src-supplier=IHS+Markit, ComponentLink2Description=https://datasheet.ciiva.com/25793/cl05a475kq5nrnc-25793634.pdf?src-supplier=Digikey, ComponentLink2URL=https://datasheet.ciiva.com/25793/cl05a475kq5nrnc-25793634.pdf?src-supplier=Digikey, Dielectric Material=Ceramic, JESD-609 Code=e3, Manufacturer Part Number=CL05A475KQ5NRNC, Mounting Technology="Surface Mount", Multilayer=Yes, Packaging="Tape and Reel", Pins=2, Pricing="1=0,08, 10=0,023, 100=0,016, 1000=0,0112, 2500=0,0096 (USD)", Reach SVHC Compliant=Yes, RoHS=Yes, RoHS Compliant=Yes, Stock=1369367, Supplier=Digikey, Terminal Finish=Nickel, Termination=Wraparound, Tolerance (fill in as +-)=10%
C12: library part CL05B471KB5VPNC, "CAP CER 470PF 50V X7R 0402", Capacitor Type=Ceramic, Case/Package=0402, LCSC Part Number=C472438, Manufacturer=Samsung, Max Operating Temperature=125°C, Min Operating Temperature=-55°C, Package Shape=Rectangular, Rated DC Voltage (URdc)=50V, Supplier Part Number=1276-6586-1-ND, Temperature Characteristics Code=X7R, Tolerance  (fill in as +-)=10%, Category="Ceramic Capacitors", ComponentLink1Description=https://datasheet.ciiva.com:443/pdfs/VipMasterIC/IC/SEMS/SEMS-S-A0005596039/SEMS-S-A0005588397-1.pdf?src-supplier=IHS+Markit, ComponentLink1URL=https://datasheet.ciiva.com:443/pdfs/VipMasterIC/IC/SEMS/SEMS-S-A0005596039/SEMS-S-A0005588397-1.pdf?src-supplier=IHS+Markit, ComponentLink2Description=http://www.samsungsem.com/kr/support/product-search/mlcc/CL05B471KB5VPNC.jsp?src-supplier=Digikey, ComponentLink2URL=http://www.samsungsem.com/kr/support/product-search/mlcc/CL05B471KB5VPNC.jsp?src-supplier=Digikey, ComponentLink3Description=http://www.samsungsem.com/servlet/FileDownload?type=spec&file=CL05B471KB5VPNC.pdf&src-supplier=Avnet, ComponentLink3URL=http://www.samsungsem.com/servlet/FileDownload?type=spec&file=CL05B471KB5VPNC.pdf&src-supplier=Avnet, ComponentLink4Description=https://datasheet.octopart.com/CL05B471KB5VPNC-Samsung-Electro-Mechanics-datasheet-110326788.pdf?src-supplier=Future+Electronics, ComponentLink4URL=https://datasheet.octopart.com/CL05B471KB5VPNC-Samsung-Electro-Mechanics-datasheet-110326788.pdf?src-supplier=Future+Electronics, Dielectric Material=Ceramic, JESD-609 Code=e3, Manufacturer Part Number=CL05B471KB5VPNC, Mounting Technology="Surface Mount", Multilayer=Yes, Packaging="Tape and Reel", Pins=2, Pricing="1=0,1, 10=0,031, 100=0,0179, 1000=0,01119, 2500=0,00885, 5000=0,00853 (USD)", Reach SVHC Compliant=Yes, Reference Standard=AEC-Q200, RoHS=Yes, RoHS Compliant=Yes, Stock=5716, Supplier=Digikey, Terminal Finish=Nickel, Termination=Wraparound, Tolerance (fill in as +-)=10%
C13 C29: library part CL05B221KB5NNNC, "CAP CER 220PF 50V X7R 0402", Capacitor Type=Ceramic, Case/Package=0402, LCSC Part Number=C296710, Manufacturer=Samsung, Max Operating Temperature=125°C, Min Operating Temperature=-55°C, Package Shape=Rectangular, Package Style=SMTMeter, Rated DC Voltage (URdc)=50V, Supplier Part Number=1276-1531-1-ND, Temperature Characteristics Code=X7R, Tolerance  (fill in as +-)=10%, Category="Ceramic Capacitors", ComponentLink1Description=https://datasheet.ciiva.com:443/pdfs/VipMasterIC/IC/SEMS/SEMS-S-A0008384515/SEMS-S-A0008872887-1.pdf?src-supplier=IHS+Markit, ComponentLink1URL=https://datasheet.ciiva.com:443/pdfs/VipMasterIC/IC/SEMS/SEMS-S-A0008384515/SEMS-S-A0008872887-1.pdf?src-supplier=IHS+Markit, ComponentLink2Description=https://datasheet.ciiva.com/25806/cl05b221kb5nnnc-25806724.pdf?src-supplier=Digikey, ComponentLink2URL=https://datasheet.ciiva.com/25806/cl05b221kb5nnnc-25806724.pdf?src-supplier=Digikey, ComponentLink3Description=https://datasheet.ciiva.com/26838/getdatasheetpartid-359684-26838219.pdf?src-supplier=Verical, ComponentLink3URL=https://datasheet.ciiva.com/26838/getdatasheetpartid-359684-26838219.pdf?src-supplier=Verical, ComponentLink4Description=https://datasheet.ciiva.com/16449/cl05b221kb5nnnc-16449133.pdf?src-supplier=Future+Electronics, ComponentLink4URL=https://datasheet.ciiva.com/16449/cl05b221kb5nnnc-16449133.pdf?src-supplier=Future+Electronics, ComponentLink5Description=https://datasheet.ciiva.com/26309/mlcc-catalogdownload2013-eng-26309018.pdf?src-supplier=Distrelec, ComponentLink5URL=https://datasheet.ciiva.com/26309/mlcc-catalogdownload2013-eng-26309018.pdf?src-supplier=Distrelec, Dielectric Material=Ceramic, Height=0.55mm, JESD-609 Code=e3, Length=1mm, Manufacturer Part Number=CL05B221KB5NNNC, Mounting Technology="Surface Mount", Multilayer=Yes, Packaging="Tape and Reel", Pins=2, Pricing="1=0,1, 10=0,019, 100=0,0104, 1000=0,00621, 2500=0,00466, 5000=0,00442 (USD)", Reach SVHC Compliant=Yes, RoHS=Yes, RoHS Compliant=Yes, Stock=59270, Supplier=Digikey, Terminal Finish=Nickel, Termination=Wraparound, Tolerance (fill in as +-)=10%, Width=0.5mm
C19: library part B2B-PH-K-S(LF)(SN), "Board Connector, 2 Contact(s), 1 Row(s), Male, Straight, 0.079 inch Pitch, Solder Terminal, Locking, Natural Insulator", Manufacturer=JST, Supplier Part Number=9491856, Category="Headers and Wire Housings", ComponentLink1Description=https://datasheet.ciiva.com:443/pdfs/VipMasterIC/IC/JSTM/JSTM-S-A0007943211/JSTM-S-A0007943211-1.pdf?src-supplier=IHS+Markit, ComponentLink1URL=https://datasheet.ciiva.com:443/pdfs/VipMasterIC/IC/JSTM/JSTM-S-A0007943211/JSTM-S-A0007943211-1.pdf?src-supplier=IHS+Markit, ComponentLink2Description=https://datasheet.ciiva.com/11746/0900766b8082f551-11746676.pdf?src-supplier=Rs, ComponentLink2URL=https://datasheet.ciiva.com/11746/0900766b8082f551-11746676.pdf?src-supplier=Rs, ComponentLink3Description=https://datasheet.ciiva.com/16422/b2b-ph-k-slfsn-16422715.pdf?src-supplier=Future+Electronics, ComponentLink3URL=https://datasheet.ciiva.com/16422/b2b-ph-k-slfsn-16422715.pdf?src-supplier=Future+Electronics, Manufacturer Part Number=B2B-PH-K-S(LF)(SN), Pricing="100=0,0919, 1000=0,0724, 2500=0,0686, 5000=0,0647, 10000=0,0615, 20000=0,0603 (EUR)", RoHS=Yes, Stock=746862, Supplier=Farnell
C20 C21: library part CL10A226MQ8NRNC, "CAP CER 22UF 6.3V X5R 0603", Capacitor Type=Ceramic, Case/Package=0603, LCSC Part Number=C59461, Manufacturer=Samsung, Max Operating Temperature=85°C, Min Operating Temperature=-55°C, Package Shape=Rectangular, Package Style=SMTMeter, Rated DC Voltage (URdc)=6.3V, Supplier Part Number=1276-1193-1-ND, Temperature Characteristics Code=X5R, Tolerance  (fill in as +-)=20%, Category="Ceramic Capacitors", ComponentLink1Description=https://datasheet.ciiva.com:443/pdfs/VipMasterIC/IC/SEMS/SEMS-S-A0008525088/SEMS-S-A0008525204-1.pdf?src-supplier=IHS+Markit, ComponentLink1URL=https://datasheet.ciiva.com:443/pdfs/VipMasterIC/IC/SEMS/SEMS-S-A0008525088/SEMS-S-A0008525204-1.pdf?src-supplier=IHS+Markit, ComponentLink2Description=https://datasheet.ciiva.com/25790/cl10a226mq8nrnc-25790695.pdf?src-supplier=Digikey, ComponentLink2URL=https://datasheet.ciiva.com/25790/cl10a226mq8nrnc-25790695.pdf?src-supplier=Digikey, ComponentLink3Description=https://datasheet.ciiva.com/26838/getdatasheetpartid-353311-26838372.pdf?src-supplier=Verical, ComponentLink3URL=https://datasheet.ciiva.com/26838/getdatasheetpartid-353311-26838372.pdf?src-supplier=Verical, ComponentLink4Description=https://datasheet.ciiva.com/29198/457121-da-01-en-vs-kondensator-0603-29198747.pdf?src-supplier=Conrad, ComponentLink4URL=https://datasheet.ciiva.com/29198/457121-da-01-en-vs-kondensator-0603-29198747.pdf?src-supplier=Conrad, ComponentLink5Description=https://datasheet.ciiva.com/16437/cl05b104kq5nnnc-16437317.pdf?src-supplier=Future+Electronics, ComponentLink5URL=https://datasheet.ciiva.com/16437/cl05b104kq5nnnc-16437317.pdf?src-supplier=Future+Electronics, Dielectric Material=Ceramic, Height=1mm, JESD-609 Code=e3, Length=1.6mm, Manufacturer Part Number=CL10A226MQ8NRNC, Mounting Technology="Surface Mount", Multilayer=Yes, Packaging="Tape and Reel", Pins=2, Pricing="1=0,22, 10=0,126, 50=0,0812, 100=0,0551, 500=0,0515, 1000=0,04061 (USD)", Reach SVHC Compliant=Yes, RoHS=Yes, RoHS Compliant=Yes, Stock=1672290, Supplier=Digikey, Terminal Finish=Nickel, Termination=Wraparound, Tolerance (fill in as +-)=20%, Width=0.8mm
C23: library part CL32A227MQVNNNE, "CAP CER 220UF 6.3V X5R 1210", Capacitor Type=Ceramic, Case/Package=1210, LCSC Part Number=C400951, Manufacturer=Samsung, Max Operating Temperature=85°C, Min Operating Temperature=-55°C, Package Shape=Rectangular, Package Style=SMTMeter, Rated DC Voltage (URdc)=6.3V, Supplier Part Number=1276-3375-6-ND, Temperature Characteristics Code=X5R, Tolerance  (fill in as +-)=20%, Category="Ceramic Capacitors", ComponentLink1Description=https://datasheet.ciiva.com:443/pdfs/VipMasterIC/IC/SEMS/SEMS-S-A0008525088/SEMS-S-A0008525201-1.pdf?src-supplier=IHS+Markit, ComponentLink1URL=https://datasheet.ciiva.com:443/pdfs/VipMasterIC/IC/SEMS/SEMS-S-A0008525088/SEMS-S-A0008525201-1.pdf?src-supplier=IHS+Markit, ComponentLink2Description=https://datasheet.ciiva.com/25722/cl32a227mqvnnne-25722912.pdf?src-supplier=Digikey, ComponentLink2URL=https://datasheet.ciiva.com/25722/cl32a227mqvnnne-25722912.pdf?src-supplier=Digikey, Dielectric Material=Ceramic, Height=2.8mm, JESD-609 Code=e3, Length=3.2mm, Manufacturer Part Number=CL32A227MQVNNNE, Mounting Technology="Surface Mount", Multilayer=Yes, Packaging="Tape and Reel", Pins=2, Pricing="1=1,9, 10=1,278, 100=0,9548 (USD)", Reach SVHC Compliant=Yes, RoHS=Yes, RoHS Compliant=Yes, Stock=100920, Supplier=Digikey, Terminal Finish=Nickel, Termination=Wraparound, Tolerance (fill in as +-)=20%, Width=2.5mm
C26 C27: library part CC1206KKX7RCBB103, "CAP CER 10000PF 1KV X7R 1206", Capacitor Type=Ceramic, Case/Package=1206, LCSC Part Number=C107192, Manufacturer=Yageo, Max Operating Temperature=125°C, Min Operating Temperature=-55°C, Package Shape=Rectangular, Package Style=SMTMeter, Rated DC Voltage (URdc)=1kV, Supplier Part Number=311-1500-1-ND, Temperature Characteristics Code=X7R, Tolerance  (fill in as +-)=10%, Category="Ceramic Capacitors", ComponentLink1Description=https://datasheet.ciiva.com:443/pdfs/VipMasterIC/IC/YAGO/YAGO-S-A0000113014/YAGO-S-A0000113014-1.pdf?src-supplier=IHS+Markit, ComponentLink1URL=https://datasheet.ciiva.com:443/pdfs/VipMasterIC/IC/YAGO/YAGO-S-A0000113014/YAGO-S-A0000113014-1.pdf?src-supplier=IHS+Markit, ComponentLink2Description=https://datasheet.ciiva.com/11788/0900766b80d8503a-11788379.pdf?src-supplier=Rs, ComponentLink2URL=https://datasheet.ciiva.com/11788/0900766b80d8503a-11788379.pdf?src-supplier=Rs, ComponentLink3Description=https://datasheet.ciiva.com/26863/getdatasheetpartid-403810-26863103.pdf?src-supplier=Verical, ComponentLink3URL=https://datasheet.ciiva.com/26863/getdatasheetpartid-403810-26863103.pdf?src-supplier=Verical, ComponentLink4Description=https://datasheet.ciiva.com/15381/upy-gp-np0-16v-to-50v-8-15381925.pdf?src-supplier=Mouser, ComponentLink4URL=https://datasheet.ciiva.com/15381/upy-gp-np0-16v-to-50v-8-15381925.pdf?src-supplier=Mouser, Dielectric Material=Ceramic, Height=1.25mm, JESD-609 Code=e3, Length=3.2mm, Manufacturer Part Number=CC1206KKX7RCBB103, Mounting Technology="Surface Mount", Multilayer=Yes, Packaging="Tape and Reel", Pins=2, Pricing="1=0,54, 10=0,329, 100=0,2222, 1000=0,16703 (USD)", Reach SVHC Compliant=Yes, RoHS=Yes, RoHS Compliant=Yes, Stock=52303, Supplier=Digikey, Terminal Finish=Nickel, Termination=Wraparound, Tolerance (fill in as +-)=10%, Width=1.6mm
C28: library part CC0805JRNPO0BN331, "CAP CER 330PF 100V C0G/NPO 0805", Capacitor Type=Ceramic, Case/Package=0805, LCSC Part Number=C113820, Manufacturer=Yageo, Max Operating Temperature=125°C, Min Operating Temperature=-55°C, Package Shape=Rectangular, Package Style=SMTMeter, Rated DC Voltage (URdc)=100V, Supplier Part Number=311-3287-1-ND, Temperature Characteristics Code=C0G, Tolerance  (fill in as +-)=5%, Category="Ceramic Capacitors", ComponentLink1Description=https://datasheet.ciiva.com:443/pdfs/VipMasterIC/IC/YAGO/YAGO-S-A0003556389/YAGO-S-A0003556389-1.pdf?src-supplier=IHS+Markit, ComponentLink1URL=https://datasheet.ciiva.com:443/pdfs/VipMasterIC/IC/YAGO/YAGO-S-A0003556389/YAGO-S-A0003556389-1.pdf?src-supplier=IHS+Markit, ComponentLink2Description=https://datasheet.ciiva.com/26862/getdatasheetpartid-486993-26862927.pdf?src-supplier=Verical, ComponentLink2URL=https://datasheet.ciiva.com/26862/getdatasheetpartid-486993-26862927.pdf?src-supplier=Verical, ComponentLink3Description=https://datasheet.ciiva.com/177/mlccorderingcode-177835.pdf?src-supplier=Digikey, ComponentLink3URL=https://datasheet.ciiva.com/177/mlccorderingcode-177835.pdf?src-supplier=Digikey, ComponentLink4Description=https://datasheet.ciiva.com/11586/upy-np0x7r-mv-100-to-630v-9-11586191.pdf?src-supplier=Avnet, ComponentLink4URL=https://datasheet.ciiva.com/11586/upy-np0x7r-mv-100-to-630v-9-11586191.pdf?src-supplier=Avnet, ComponentLink5Description=https://datasheet.ciiva.com/17206/upy-np0x7r-mv-100-to-630v-9-17206229.pdf?src-supplier=Future+Electronics, ComponentLink5URL=https://datasheet.ciiva.com/17206/upy-np0x7r-mv-100-to-630v-9-17206229.pdf?src-supplier=Future+Electronics, Dielectric Material=Ceramic, Height=0.6mm, JESD-609 Code=e3, Length=2mm, Manufacturer Part Number=CC0805JRNPO0BN331, Mounting Technology="Surface Mount", Multilayer=Yes, Packaging="Tape and Reel", Pins=2, Pricing="1=0,13, 10=0,071, 100=0,0428, 1000=0,02846 (USD)", Reach SVHC Compliant=Yes, RoHS=Yes, RoHS Compliant=Yes, Stock=1000, Supplier=Digikey, Terminal Finish=Nickel, Termination=Wraparound, Tolerance (fill in as +-)=5%, Width=1.25mm
C30: "IC COMPARATOR 1 GEN PUR SC70-5", Average Bias Current-Max (IIB)=20nA, Bias Current-Max (IIB) @25C=100pA, Case/Package=TSSOP, Input Offset Voltage-Max=22mV, LCSC Part Number=C180352, Manufacturer="Texas Instruments", Max Operating Temperature=125°C, Max Supply Current=200nA, Min Operating Temperature=-40°C, Package Body Material=Plastic, Package Equivalence Code=TSSOP5/6,.08, Package Shape=Rectangular, Package Style="SMALL OUTLINE, THIN PROFILE, SHRINK PITCHMeter", Peak Reflow Temperature (Cel)=260°C, Power Supplies=0.9/6.5V, Supplier Part Number=296-37910-1-ND, Supply Voltage Limit-Max=7V, Temperature Grade=AUTOMOTIVE, Amplifier Type=COMPARATOR, Category="Amplifiers - Op Amps, Buffer, Instrumentation", Channels=1, ComponentLink1Description=https://www.ti.com:443/lit/ds/symlink/tlv3691.pdf?src-supplier=IHS+Markit, ComponentLink1URL=https://www.ti.com:443/lit/ds/symlink/tlv3691.pdf?src-supplier=IHS+Markit, ComponentLink2Description=http://components.arrow.com/part/dataview/63066199S705887N7713?src-supplier=Arrow+Electronics, ComponentLink2URL=http://components.arrow.com/part/dataview/63066199S705887N7713?src-supplier=Arrow+Electronics, ComponentLink3Description=http://www.ti.com/lit/ds/symlink/tlv3691.pdf?src-supplier=Digikey, ComponentLink3URL=http://www.ti.com/lit/ds/symlink/tlv3691.pdf?src-supplier=Digikey, ComponentLink4Description=http://www.ti.com/lit/ds/symlink/tlv3691.pdf?src-supplier=Farnell, ComponentLink4URL=http://www.ti.com/lit/ds/symlink/tlv3691.pdf?src-supplier=Farnell, ComponentLink5Description=http://www.ti.com/lit/ds/symlink/tlv3691.pdf?src-supplier=Avnet, ComponentLink5URL=http://www.ti.com/lit/ds/symlink/tlv3691.pdf?src-supplier=Avnet, ComponentLink6Description=http://www.ti.com/lit/gpn/tlv3691?src-supplier=Mouser, ComponentLink6URL=http://www.ti.com/lit/gpn/tlv3691?src-supplier=Mouser, Height - Seated (Max)=1.1mm, JESD-30 Code=R-PDSO-G5, JESD-609 Code=e4, Length=2mm, Manufacturer Part Number=TLV3691IDCKR, Moisture Sensitivity Level=2, Output Type=PUSH-PULL, Pins=5, Pricing="1=1,1, 10=0,796, 25=0,7192, 100=0,6347, 250=0,59452, 500=0,57026, 1000=0,5503 (USD)", Qualification Status="Not Qualified", Reach SVHC Compliant=Yes, Response Time-Nom=40000ns, RoHS=Yes, RoHS Compliant=Yes, Stock=71451, Supplier=Digikey, Surface Mount=Yes, Terminal Finish=Nickel, Terminal Form="Gull Wing", Terminal Pitch=0.65mm, Terminal Position=DUAL, Width=1.25mm
C31: library part CC1206JKNPOCBN100, "CAP CER 10PF 1KV C0G/NPO 1206", Capacitor Type=Ceramic, Case/Package=1206, LCSC Part Number=C107172, Manufacturer=Yageo, Max Operating Temperature=125°C, Min Operating Temperature=-55°C, Package Style=SMTMeter, Rated DC Voltage (URdc)=1kV, Supplier Part Number=311-1912-6-ND, Temperature Characteristics Code=NP0, Tolerance  (fill in as +-)=5%, Category="Ceramic Capacitors", ComponentLink1Description=https://datasheet.ciiva.com:443/pdfs/VipMasterIC/IC/YAGO/YAGO-S-A0000113014/YAGO-S-A0000113014-1.pdf?src-supplier=IHS+Markit, ComponentLink1URL=https://datasheet.ciiva.com:443/pdfs/VipMasterIC/IC/YAGO/YAGO-S-A0000113014/YAGO-S-A0000113014-1.pdf?src-supplier=IHS+Markit, ComponentLink2Description=https://datasheet.ciiva.com/11494/hv-11494856.pdf?src-supplier=Avnet, ComponentLink2URL=https://datasheet.ciiva.com/11494/hv-11494856.pdf?src-supplier=Avnet, Dielectric Material=Ceramic, Height=1.25mm, JESD-609 Code=e3, Length=3.2mm, Manufacturer Part Number=CC1206JKNPOCBN100, Multilayer=Yes, Packaging="Tape and Reel", Pins=2, Pricing="1=0,22, 10=0,129, 100=0,0815, 1000=0,05691 (USD)", Reach SVHC Compliant=Yes, RoHS=Yes, RoHS Compliant=Yes, Series=SIZE(HIGH-VOLTAGE), Stock=6057, Supplier=Digikey, Terminal Finish=Nickel, Tolerance (fill in as +-)=5%, Width=1.6mm
D1 D5 D11: "DIODE SCHOTTKY 40V 1A SOD123", Forward Voltage=320mV, LCSC Part Number=C82544, Manufacturer=Diodes, Max Operating Temperature=125°C, Max Output current=1A, Max Power Dissipation=450mW, Min Operating Temperature=-65°C, Non-rep Pk Forward Current-Max=25A, Package Body Material=Plastic, Package Shape=Rectangular, Package Style="SMALL OUTLINEMeter", Peak Reflow Temperature (Cel)=260°C, Rep Pk Reverse Voltage-Max=40V, Supplier Part Number=1N5819HW-FDICT-ND, Time @ Peak Reflow Temperature-Max (s)=40s, Category="Schottky Diodes", ComponentLink1Description=https://datasheet.ciiva.com:443/pdfs/VipMasterIC/IC/DIOD/DIOD-S-A0009689747/DIOD-S-A0009691035-1.pdf?src-supplier=IHS+Markit, ComponentLink1URL=https://datasheet.ciiva.com:443/pdfs/VipMasterIC/IC/DIOD/DIOD-S-A0009689747/DIOD-S-A0009691035-1.pdf?src-supplier=IHS+Markit, ComponentLink2Description=https://datasheet.ciiva.com/27092/1538419-27092484.pdf?src-supplier=Jameco, ComponentLink2URL=https://datasheet.ciiva.com/27092/1538419-27092484.pdf?src-supplier=Jameco, ComponentLink3Description=https://datasheet.ciiva.com/16303/ds30217-16303296.pdf?src-supplier=Future+Electronics, ComponentLink3URL=https://datasheet.ciiva.com/16303/ds30217-16303296.pdf?src-supplier=Future+Electronics, ComponentLink4Description=https://datasheet.ciiva.com/1177/ds30217-1177089.pdf?src-supplier=Element14, ComponentLink4URL=https://datasheet.ciiva.com/1177/ds30217-1177089.pdf?src-supplier=Element14, ComponentLink5Description=https://datasheet.ciiva.com/8303/ds30217-8303132.pdf?src-supplier=Avnet, ComponentLink5URL=https://datasheet.ciiva.com/8303/ds30217-8303132.pdf?src-supplier=Avnet, ComponentLink6Description=https://datasheet.ciiva.com/912/ds30217-912802.pdf?src-supplier=Digikey, ComponentLink6URL=https://datasheet.ciiva.com/912/ds30217-912802.pdf?src-supplier=Digikey, ComponentLink7Description=https://datasheet.ciiva.com/912/ds30217-912803.pdf?src-supplier=Digikey, ComponentLink7URL=https://datasheet.ciiva.com/912/ds30217-912803.pdf?src-supplier=Digikey, ComponentLink8Description=https://datasheet.ciiva.com/912/ds30217-912801.pdf?src-supplier=Digikey, ComponentLink8URL=https://datasheet.ciiva.com/912/ds30217-912801.pdf?src-supplier=Digikey, Diode Element Material=SILICON, Diode Type=RECTIFIER, JESD-30 Code=R-PDSO-G2, JESD-609 Code=e3, Manufacturer Part Number=1N5819HW-7-F, Moisture Sensitivity Level=1, Number of Elements=1, Pins=2, Pricing="1=0,25, 10=0,17, 100=0,1207, 500=0,10056, 1000=0,09006 (USD)", Qualification Status="Not Qualified", Reach SVHC Compliant=Yes, RoHS=Yes, RoHS Compliant=Yes, Stock=462387, Supplier=Digikey, Surface Mount=Yes, Technology=SCHOTTKY, Terminal Finish=Tin, Terminal Form="Gull Wing", Terminal Position=DUAL